# Altium PCB PCB_BanTay_v1-copy_2025-10-17.pcbdoc (part 1 of 2)
Units mm, origin at the board's own origin, x right, y up, seen from the top; angles counter-clockwise.
Board outline 141.09 x 106.47 mm, 2 copper layers (Top Layer, Bottom Layer); 135 components, 142 nets, 539 pads, 635 vias.
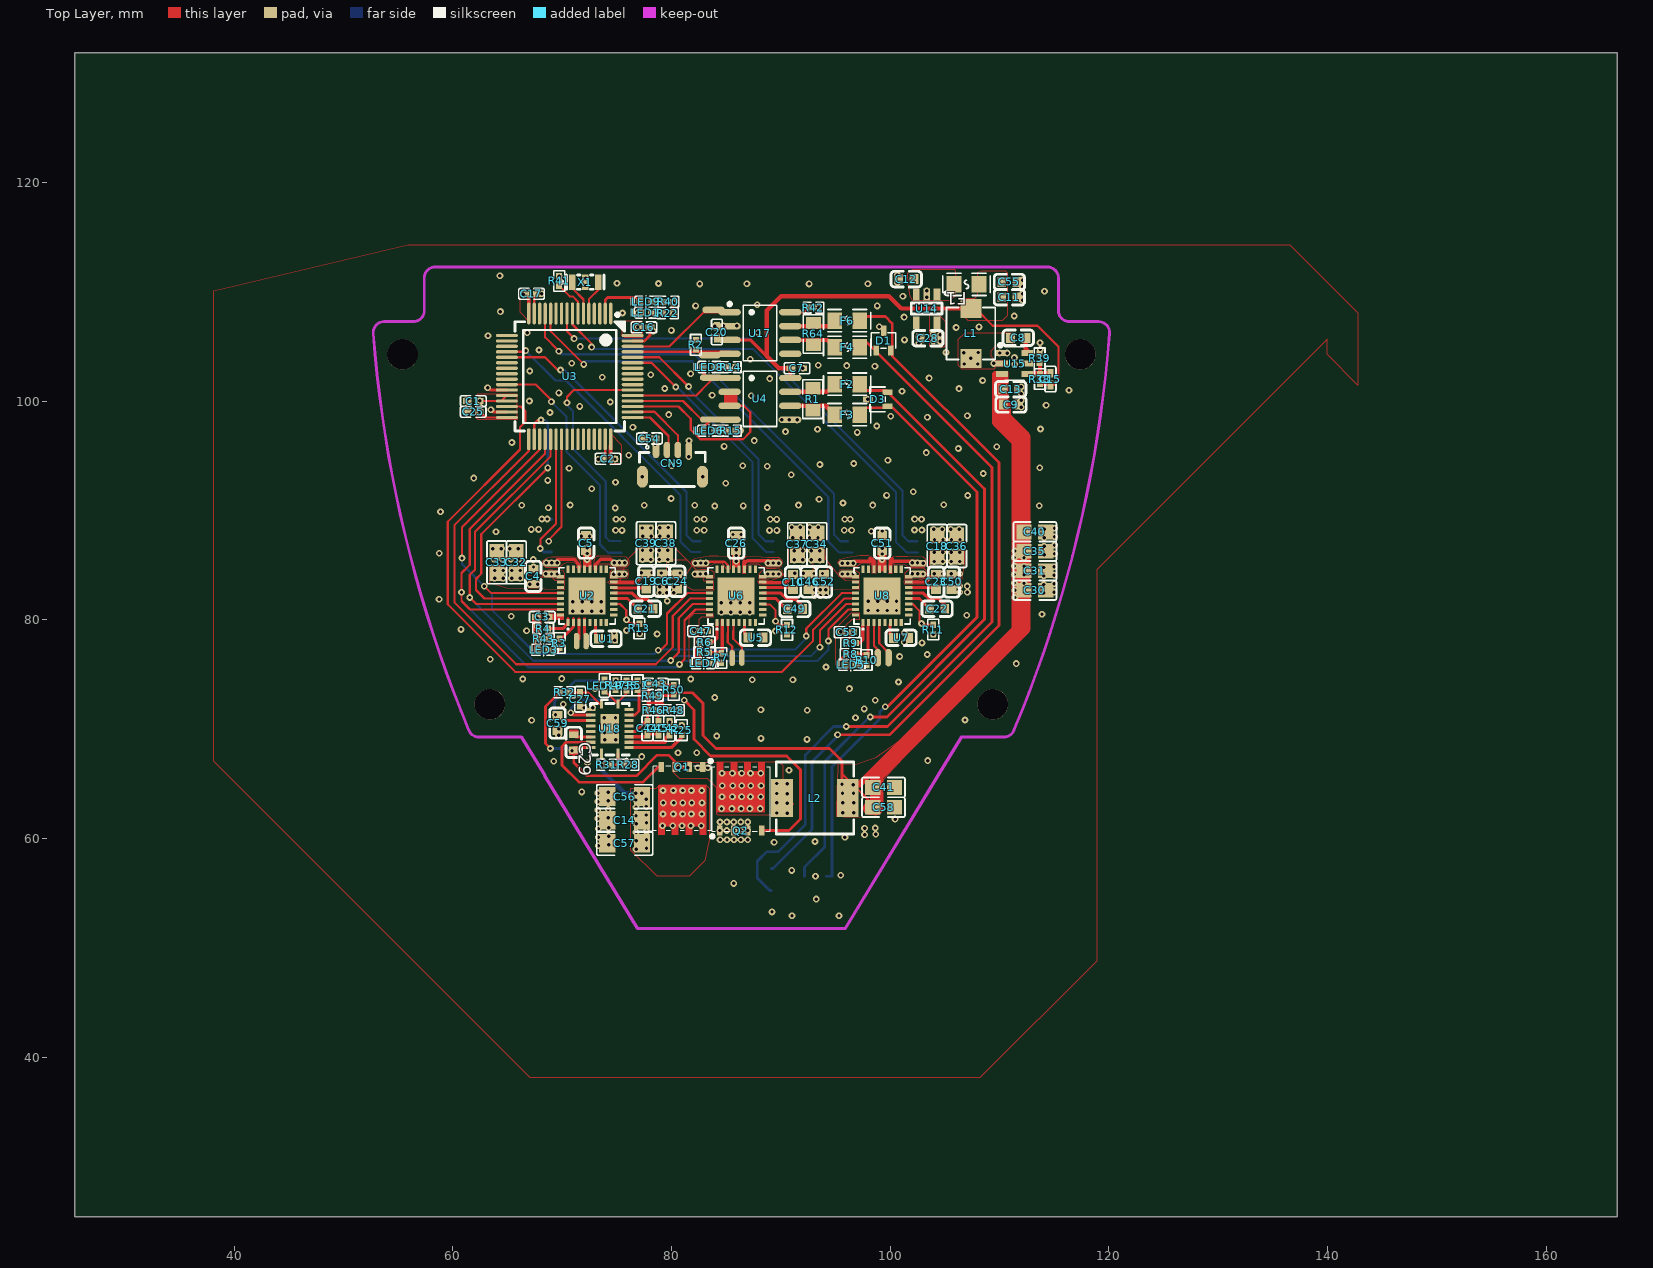
[diagram p0: Top Layer view]
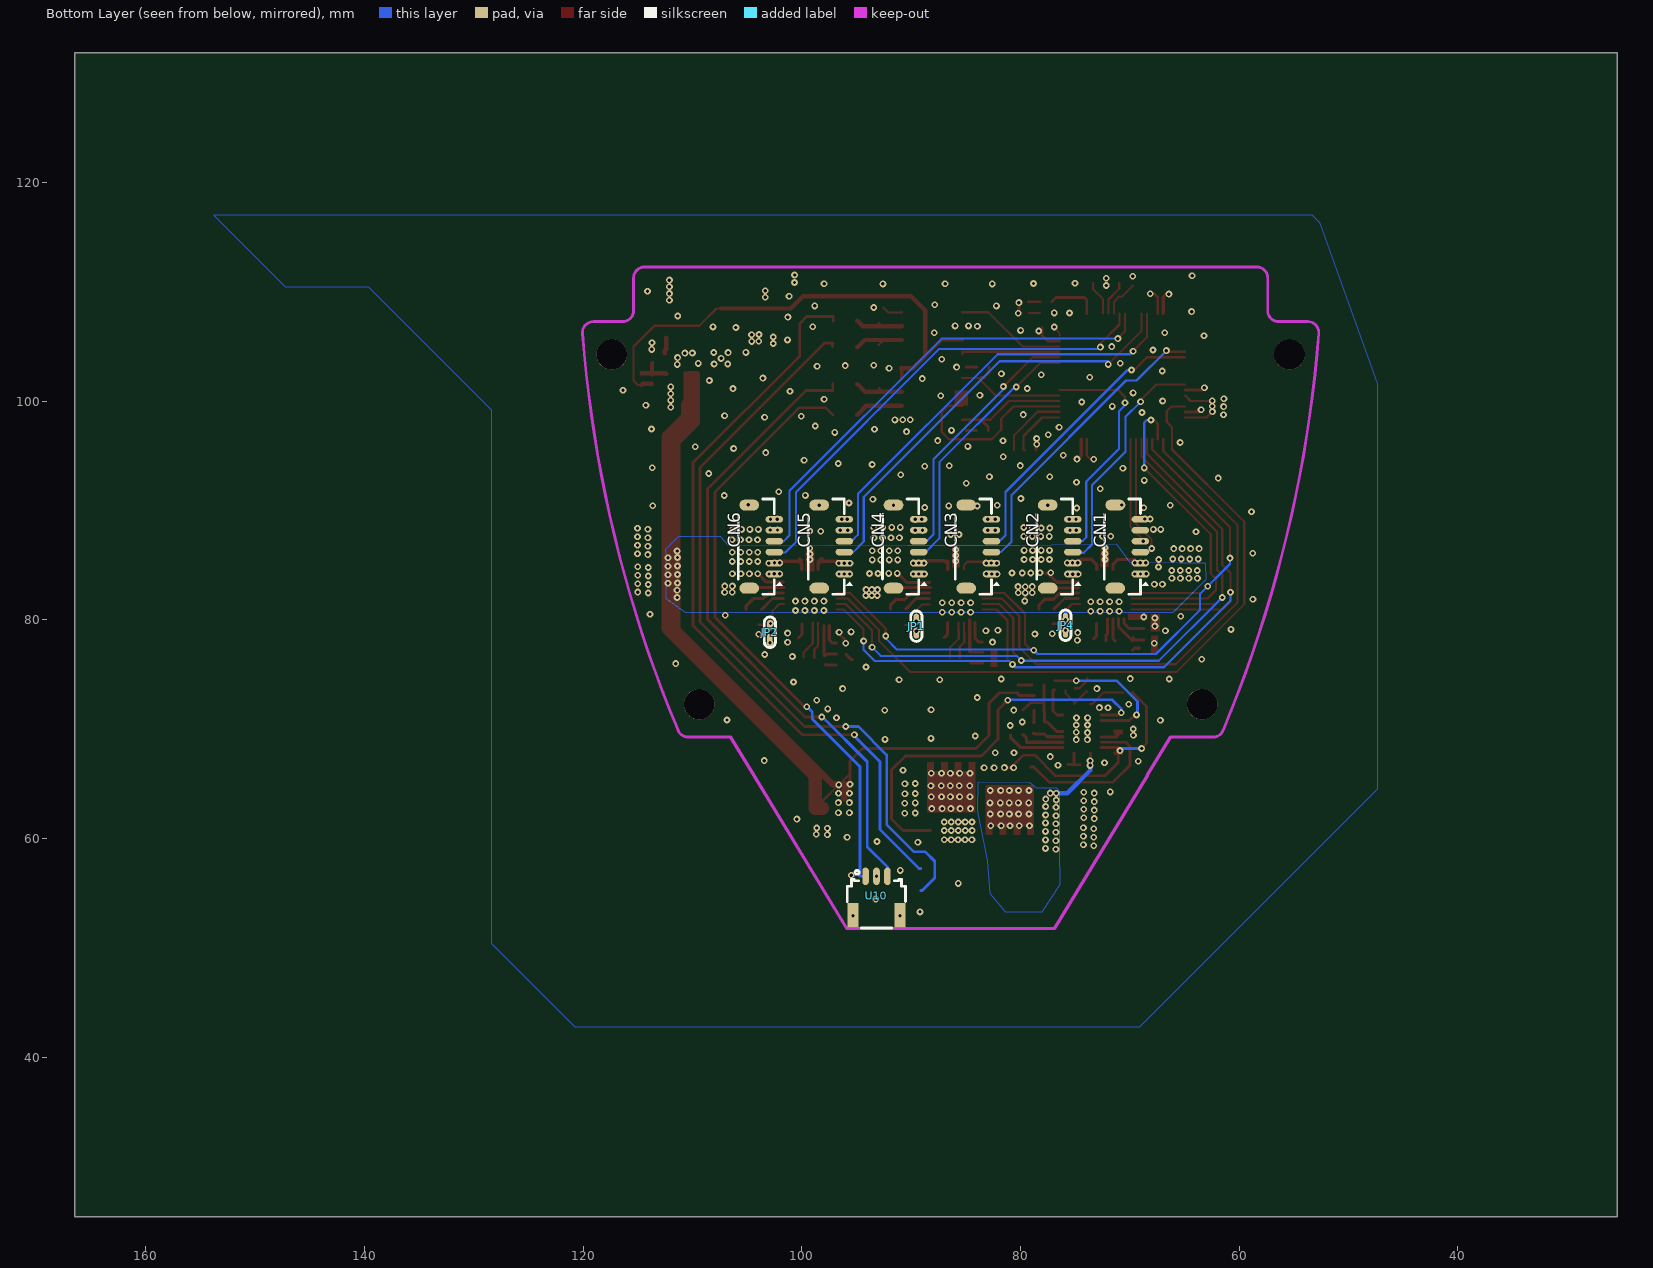
[diagram p1: Bottom Layer view, seen from below]

## Layer stack, top to bottom
Top Layer: signal copper (thickness not stored)
Dielectric: dielectric 0.32, FR-4, Dk 4.8
Bottom Layer: signal copper (thickness not stored)

## Board outline
166.495,25.4 25.4,25.4 25.4,131.87 166.495,131.87

## Components (designator, comment, footprint, x,y, rotation, side; value= is the part's Value field where it differs from the comment)
C1 "100nF" C0402 61.86,100 r0 top
C2 "100nF" C0402 74.17,94.72 r0 top
C3 "100nF" C0402 68.17,80.26 r0 top
C4 "220nF" C0603#1 67.35,83.97 r270 top
C5 "220nF" C0603#2 72.18,87.01 r90 top
C6 "220nF" C0603#2 79.11,83.52 r90 top
C7 "100nF" C0402 91.46,103.01 r0 top
C8 "100nF" C0603#2 111.7,105.79 r0 top
C9 "10uF" C0603#2 111.04,99.69 r180 top
C10 "1uF" C0603#2 91.1,83.45 r90 top
C11 "22uF" C0603#2 110.89,109.5 r180 top
C12 "1uF" C0603#2 101.46,111.16 r0 top
C13 "100nF" C0603#2 111.01,101.09 r180 top
C14 "4.7uF" C1206 75.7,61.67 r0 top
C15 "75pF" C0402 114.65,102.02 r270 top
C16 "100nF" C0402 77.47,106.74 r180 top
C17 "100nF" C0402 67.18,109.81 r180 top
C18 "10uF" C0805 104.293,86.75 r270 top
C19 "1uF" C0603#2 77.68,83.52 r90 top
C20 "100nF" C0402 84.14,106.32 r90 top
C21 "22nF" C0603#2 77.6,81.01 r180 top
C22 "22nF" C0603#2 104.28,81.01 r180 top
C23 "1uF" C0603#2 104.19,83.46 r90 top
C24 "220nF" C0603#2 80.51,83.52 r90 top
C25 "1uF" C0402 61.85,99.02 r0 top
C26 "220nF" C0603#2 85.9,87.01 r90 top
C27 "12pF" C0402 71.63,72.73 r270 top
C28 "1uF" C0603#2 103.44,105.75 r180 top
C29 "100nF" C0603#3 71.04,68.79 r270 top
C30 "10uF" C0805 113.23,82.711 r180 top
C31 "10uF" C0805 113.23,84.487 r180 top
C32 "10uF" C0805 65.79,85.25 r270 top
C33 "10uF" C0805 64.014,85.25 r270 top
C34 "10uF" C0805 93.286,86.92 r270 top
C35 "10uF" C0805 113.23,86.264 r180 top
C36 "10uF" C0805 106.07,86.75 r270 top
C37 "10uF" C0805 91.51,86.92 r270 top
C38 "10uF" C0805 79.46,87 r270 top
C39 "10uF" C0805 77.684,87 r270 top
C40 "10uF" C0805 113.23,88.04 r180 top
C41 "22uF" C0805 99.38,64.67 r0 top
C42 "1uF" C0402 79.79,70.07 r270 top
C43 "470pF" C0402 78.53,74.13 r0 top
C44 "330pF" C0402 77.79,70.1 r90 top
C45 "3.9nF" C0402 78.79,70.1 r270 top
C46 "220nF" C0603#2 92.52,83.46 r90 top
C47 "100nF" C0402 82.64,78.97 r180 top
C49 "22nF" C0603#2 91.27,80.99 r180 top
C50 "220nF" C0603#2 105.61,83.46 r90 top
C51 "220nF" C0603#2 99.26,87.01 r90 top
C52 "220nF" C0603#2 93.94,83.46 r90 top
C53 "100nF" C0402 96.03,78.87 r180 top
C54 "100nF" C0402 77.97,96.58 r0 top
C55 "22uF" C0603#2 110.89,110.9 r180 top
C56 "4.7uF" C1206 75.7,63.83 r0 top
C57 "4.7uF" C1206 75.7,59.56 r0 top
C58 "22uF" C0805 99.38,62.86 r0 top
C59 "2.2uF" C0603#2 69.56,70.55 r90 top
CN1 "XY-SH1.0-6A51" CONN-SMD_6P-P1.00_XY-SH1.0-6A51 70.173,86.69 r270 bottom
CN2 "XY-SH1.0-6A51" CONN-SMD_6P-P1.00_XY-SH1.0-6A51 76.35,86.69 r270 bottom
CN3 "XY-SH1.0-6A51" CONN-SMD_6P-P1.00_XY-SH1.0-6A51 83.797,86.69 r270 bottom
CN4 "XY-SH1.0-6A51" CONN-SMD_6P-P1.00_XY-SH1.0-6A51 90.45,86.69 r270 bottom
CN5 "XY-SH1.0-6A51" CONN-SMD_6P-P1.00_XY-SH1.0-6A51 97.25,86.69 r270 bottom
CN6 "XY-SH1.0-6A51" CONN-SMD_6P-P1.00_XY-SH1.0-6A51 103.65,86.69 r270 bottom
CN9 "1.0-4P LT" CONN-SMD_4P-P1.00_SHOU-HAN_1.0-4P-LT 80.07,94.31 r0 top
D1 "TPD2E007DCKR" SOT-323-3_L2.0-W1.3-P1.30-LS2.1-BR 99.38,105.54 r270 top
D3 "TPD2E007DCKR" SOT-323-3_L2.0-W1.3-P1.30-LS2.1-BR 98.85,100.17 r0 top
F1 "JK-SMD0805-050" F0805 106.97,110.68 r180 top
F2 "JK-SMD0805-050" F0805 96.05,101.56 r0 top
F3 "JK-SMD0805-050" F0805 96.05,98.76 r0 top
F4 "JK-SMD0805-050" F0805 96.05,104.93 r0 top
F6 "JK-SMD0805-050" F0805 96.05,107.36 r0 top
JP1 "SB" "SOLDER BRIDGE FOOTPRINT" 89.51,79.42 r90 bottom
JP2 "SB" "SOLDER BRIDGE FOOTPRINT" 102.91,78.86 r90 bottom
JP4 "SB" "SOLDER BRIDGE FOOTPRINT" 75.87,79.5 r90 bottom
L1 "10uH" IND-SMD_L4.5-W4.5_SMMS0420 107.37,106.19 r270 top
L2 "4.7uH" IND-SMD_L7.1-W6.6_SL0650 93.11,63.7 r0 top
LED1 "TZ-P2-0402RTIA1-0.45T" LED0402-RD_RED 77.64,108.1 r0 top
LED3 "TZ-P2-0402RTIA1-0.45T" LED0402-RD_RED 68.29,77.26 r180 top
LED5 "TZ-P2-0402RTIA1-0.45T" LED0402-RD_RED 96.37,75.87 r180 top
LED6 "TZ-P2-0402YGTIA1-0.45T" LED0402-RD_GREEN 83.42,97.31 r0 top
LED7 "TZ-P2-0402RTIA1-0.45T" LED0402-RD_RED 82.94,76.04 r180 top
LED8 "TZ-P2-0402 0TIA1-0.45T" LED0402-RD_ORANGE 83.42,103.12 r0 top
LED9 "SZYY0402B" LED0402-RD_BLUE 77.66,109.1 r0 top
LED10 "TZ-P2-0402RTIA1-0.45T" LED0402-RD_RED 73.87,73.98 r90 top
Q1 "BSC070N10NS5(ES)" TDSON-8_L5.9-W5.2-P1.27-BL-1 80.96,64.77 r180 top
Q2 "BSC070N10NS5(ES)" TDSON-8_L5.9-W5.2-P1.27-BL-1 86.32,62.5 r0 top
R1 "120Ω" R0805 92.92,100.18 r90 top
R2 "10kΩ" R0402 82.22,105.15 r270 top
R3 "1kΩ" R0402 69.74,77.87 r90 top
R4 "12kΩ" R0402 68.25,79.19 r0 top
R5 "10kΩ" R0402 82.99,77.01 r180 top
R6 "12kΩ" R0402 83.02,77.96 r0 top
R7 "1kΩ" R0402 84.54,76.51 r90 top
R8 "10kΩ" R0402 96.38,76.86 r180 top
R9 "12kΩ" R0402 96.4,77.86 r0 top
R10 "1kΩ" R0402 97.83,76.32 r90 top
R11 "10kΩ" R0402 103.93,79.11 r270 top
R12 "10kΩ" R0402 90.55,79.08 r270 top
R13 "10kΩ" R0402 77.05,79.21 r270 top
R14 "1kΩ" R0402 85.4,103.11 r0 top
R15 "1kΩ" R0402 85.4,97.31 r0 top
R22 "1kΩ" R0402 79.65,108.06 r180 top
R25 "33kΩ" R0402 80.92,69.9 r270 top
R28 "12.4kΩ" R0402 76.05,66.75 r180 top
R31 "49.9kΩ" R0402 74.08,66.75 r180 top
R32 "392Ω" R0402 70.21,73.36 r180 top
R35 "20kΩ" R0402 75.88,73.99 r90 top
R38 "100kΩ" R0402 113.69,102.02 r270 top
R39 "13.7kΩ" R0402 113.65,103.91 r270 top
R40 "1kΩ" R0402 79.68,109.08 r0 top
R41 "10kΩ" R0402 69.71,110.99 r90 top
R42 "4.7kΩ" R0402 92.97,108.56 r180 top
R43 "10kΩ" R0402 68.28,78.25 r180 top
R46 "3.57kΩ" R0402 78.3,71.74 r0 top
R47 "2.2kΩ" R0402 74.88,74 r270 top
R48 "3.09kΩ" R0402 80.18,71.74 r180 top
R49 "24kΩ" R0402 78.27,73.07 r0 top
R50 "47.5Ω" R0402 80.19,73.59 r270 top
R51 "1kΩ" R0402 76.88,74 r270 top
R64 "120Ω" R0805 92.96,106.15 r90 top
U1 "2.2uF" C0603#2 74,78.26 r0 top
U2 "MAX22216ATJY+_C20416745" QFN-32_L5.0-W5.0-P0.50-TL-EP3.4 72.27,82.19 r90 top
U3 "STM32G474RET6" LQFP-64_L10.0-W10.0-P0.50-LS12.0-BL 70.68,102.26 r180 top
U4 "MAX485CSA+T" SOIC-8_L4.9-W3.9-P1.27-LS6.0-BL 88.08,100.21 r270 top
U5 "2.2uF" C0603#2 87.67,78.37 r0 top
U6 "MAX22216ATJY+_C20416745" QFN-32_L5.0-W5.0-P0.50-TL-EP3.4 85.9,82.19 r90 top
U7 "2.2uF" C0603#2 100.99,78.35 r0 top
U8 "MAX22216ATJY+_C20416745" QFN-32_L5.0-W5.0-P0.50-TL-EP3.4 99.25,82.189 r90 top
U10 "HX 1.0-3P WTDK" CONN-SMD_3P-P1.00_HANXIA_HX-1.0-3P-WTDK 93.16,54.74 r0 bottom
U14 "AP2112K-3.3TRG1" SOT-25-5_L2.9-W1.6-P0.95-LS2.8-BL 103.33,108.47 r180 top
U15 "TPS54302DDCR" SOT-23-6_L2.9-W1.6-P0.95-LS2.8-BL 111.37,103.44 r270 top
U17 "TJA1051T/1J" SOIC-8_L4.9-W3.9-P1.27-LS6.0-BL 88.08,106.23 r270 top
U18 "LM5146RGYR" VQFN-20_L4.5-W3.5-P0.50-BL-EP 74.35,70.05 r90 top
X1 "8MHz" OSC-SMD_3P-L3.2-W1.3-P1.20-L 72.1,110.88 r0 top

## Footprints (in the part's own frame and the unit in brackets; to place one, negate y for a bottom-side part, rotate by r counter-clockwise, add the part's x,y. Pads: shape width x height; smd on the part's side, far side on the other; paste and mask are expansions set on the pad)
C0402 [mm]
  rect 0.79x0.54 smd paste-100 mask+0.051: 1(-0.545,0) 2(0.545,0)
  silkscreen extent -1.17,-0.5 1.17,0.5
C0603#1 [mm]
  rect 0.7x0.9 smd paste+0 mask+0.051: 1(-0.7,0) 2(0.7,0)
  silkscreen extent -1.39,-0.71 1.39,0.71
C0603#2 [mm]
  rect 0.8x0.9 smd paste+0 mask+0.051: 1(-0.7,0) 2(0.7,0)
  silkscreen extent -1.39,-0.71 1.39,0.71
C0603#3 [mm]
  rect 0.6x0.9 smd paste+0 mask+0.051: 1(-0.7,0) 2(0.7,0)
  silkscreen extent -1.39,-0.71 1.39,0.71
C0805 [mm]
  rect 1.41x1.35 smd paste-100 mask+0.051: 1(-1,0) 2(1,0)
  silkscreen extent -1.96,-0.9 1.96,0.9
C1206 [mm]
  rect 1.485x1.728 smd paste-100 mask+0.051: 1(-1.593,0) 2(1.593,0)
  silkscreen extent -2.56,-1.09 2.56,1.09
CONN-SMD_3P-P1.00_HANXIA_HX-1.0-3P-WTDK [mm]
  oval 0.6x1.6 smd paste+0 mask+0.051: 1(1,-1.8) 2(0,-1.8) 3(-1,-1.8)
  rect 1x2.3 smd paste+0 mask+0.051: 4(-2.15,1.8) 5(2.15,1.8)
  silkscreen extent -2.67,-2.34 2.67,2.92
CONN-SMD_4P-P1.00_SHOU-HAN_1.0-4P-LT [mm]
  oval 0.6x1.5 smd paste+0 mask+0.05: 1(-1.5,1.225) 2(-0.5,1.225) 3(0.5,1.225) 4(1.5,1.225)
  oval 1x2 smd paste+0 mask+0.05: 5(2.75,-1.225) 6(-2.75,-1.225)
  silkscreen extent -3,-2.12 3,1.62
CONN-SMD_6P-P1.00_XY-SH1.0-6A51 [mm]
  oval 0.6x1.6 smd paste+0 mask+0.05: 1(2.5,1.15) 2(1.5,1.15) 3(0.5,1.15) 4(-0.5,1.15) 5(-1.5,1.15) 6(-2.5,1.15)
  oval 1x1.8 smd paste+0 mask+0.05: 7(-3.8,-1.15) 8(3.8,-1.15)
  silkscreen extent -4.35,-2.15 4.35,1.91
F0805 [mm]
  rect 1.335x1.5 smd paste-100 mask+0.051: 1(-1.142,0) 2(1.142,0)
  silkscreen extent -2.16,-1.02 2.16,1.02
IND-SMD_L4.5-W4.5_SMMS0420 [mm]
  rect 1.724x1.92 smd paste+0 mask+0.051: 1(2.278,0) 2(-2.278,0)
  silkscreen extent -2.38,-2.23 2.38,2.23
IND-SMD_L7.1-W6.6_SL0650 [mm]
  rect 2x3.5 smd paste+0 mask+0.051: 1(-3,0) 2(2.999,0)
  silkscreen extent -3.55,-3.3 3.55,3.3
LED0402-RD_BLUE [mm]
  rect 0.636x0.54 smd paste-100 mask+0.051: 1(-0.538,0) 2(0.538,0)
  silkscreen extent -1.39,-0.54 1.09,0.54
LED0402-RD_GREEN [mm]
  rect 0.636x0.54 smd paste-100 mask+0.051: 1(-0.538,0) 2(0.538,0)
  silkscreen extent -1.39,-0.54 1.09,0.54
LED0402-RD_ORANGE [mm]
  rect 0.636x0.54 smd paste-100 mask+0.051: 1(-0.538,0) 2(0.538,0)
  silkscreen extent -1.39,-0.54 1.09,0.54
LED0402-RD_RED [mm]
  rect 0.636x0.54 smd paste-100 mask+0.051: 1(-0.508,0) 2(0.508,0)
  silkscreen extent -1.39,-0.54 1.09,0.54
LQFP-64_L10.0-W10.0-P0.50-LS12.0-BL [mm]
  oval 0.3x2 smd paste+0 mask+0.051: 1(-3.75,-5.75) 2(-3.25,-5.75) 3(-2.75,-5.75) 4(-2.25,-5.75) 5(-1.75,-5.75) 6(-1.25,-5.75) 7(-0.75,-5.75) 8(-0.25,-5.75) 9(0.25,-5.75) 10(0.75,-5.75) 11(1.25,-5.75) 12(1.75,-5.75) 13(2.25,-5.75) 14(2.75,-5.75) 15(3.25,-5.75) 16(3.75,-5.75) 33(3.75,5.75) 34(3.25,5.75) 35(2.75,5.75) 36(2.25,5.75) 37(1.75,5.75) 38(1.25,5.75) 39(0.75,5.75) 40(0.25,5.75) 41(-0.25,5.75) 42(-0.75,5.75) 43(-1.25,5.75) 44(-1.75,5.75) 45(-2.25,5.75) 46(-2.75,5.75) 47(-3.25,5.75) 48(-3.75,5.75)
  oval 2x0.3 smd paste+0 mask+0.051: 17(5.75,-3.75) 18(5.75,-3.25) 19(5.75,-2.75) 20(5.75,-2.25) 21(5.75,-1.75) 22(5.75,-1.25) 23(5.75,-0.75) 24(5.75,-0.25) 25(5.75,0.25) 26(5.75,0.75) 27(5.75,1.25) 28(5.75,1.75) 29(5.75,2.25) 30(5.75,2.75) 31(5.75,3.25) 32(5.75,3.75) 49(-5.75,3.75) 50(-5.75,3.25) 51(-5.75,2.75) 52(-5.75,2.25) 53(-5.75,1.75) 54(-5.75,1.25) 55(-5.75,0.75) 56(-5.75,0.25) 57(-5.75,-0.25) 58(-5.75,-0.75) 59(-5.75,-1.25) 60(-5.75,-1.75) 61(-5.75,-2.25) 62(-5.75,-2.75) 63(-5.75,-3.25) 64(-5.75,-3.75)
  silkscreen extent -5,-5.79 5,5
OSC-SMD_3P-L3.2-W1.3-P1.20-L [mm]
  rect 0.6x1.4 smd paste+0 mask+0.051: 1(-1.199,0) 2(0,0) 3(1.199,0)
  silkscreen extent -2.28,-0.65 1.72,0.66
QFN-32_L5.0-W5.0-P0.50-TL-EP3.4 [mm]
  rect 0.665x0.28 smd paste-100 mask+0.051: 1(-2.432,1.75) 2(-2.432,1.25) 3(-2.432,0.75) 4(-2.432,0.25) 5(-2.432,-0.25) 6(-2.432,-0.75) 7(-2.432,-1.25) 8(-2.432,-1.75) 17(2.432,-1.75) 18(2.432,-1.25) 19(2.432,-0.75) 20(2.432,-0.25) 21(2.432,0.25) 22(2.432,0.75) 23(2.432,1.25) 24(2.432,1.75)
  rect 0.28x0.665 smd paste-100 mask+0.051: 9(-1.75,-2.432) 10(-1.25,-2.432) 11(-0.75,-2.432) 12(-0.25,-2.432) 13(0.25,-2.432) 14(0.75,-2.432) 15(1.25,-2.432) 16(1.75,-2.432) 25(1.75,2.432) 26(1.25,2.432) 27(0.75,2.432) 28(0.25,2.432) 29(-0.25,2.432) 30(-0.75,2.432) 31(-1.25,2.432) 32(-1.75,2.432)
  rect 3.4x3.4 smd paste-100 mask+0.051: 33(0,0)
  silkscreen extent -3.11,-2.58 2.58,2.58
R0402 [mm]
  rect 0.566x0.54 smd paste-100 mask+0.051: 1(-0.433,0) 2(0.433,0)
  silkscreen extent -0.94,-0.5 0.94,0.5
R0805 [mm]
  rect 1.133x1.377 smd paste-100 mask+0.051: 1(-1,0) 2(1,0)
  silkscreen extent -1.76,-0.92 1.76,0.92
SOIC-8_L4.9-W3.9-P1.27-LS6.0-BL [mm]
  oval 0.588x2.045 smd paste+0 mask+0.051: 1(-1.905,-2.773) 2(-0.635,-2.773) 3(0.635,-2.773) 4(1.905,-2.773) 5(1.905,2.773) 6(0.635,2.773) 7(-0.635,2.773) 8(-1.905,2.773)
  silkscreen extent -2.8,-2.92 2.53,1.52
"SOLDER BRIDGE FOOTPRINT" [mm]
  oval 1x0.5 smd paste+0 mask+0.051: 1(0.635,0) 2(-0.635,0)
  silkscreen extent -1.4,-0.51 1.4,0.51
SOT-23-6_L2.9-W1.6-P0.95-LS2.8-BL [mm]
  rect 0.532x1.072 smd paste+0 mask+0.051: 1(-0.95,-1.149) 2(0,-1.149) 3(0.95,-1.149) 4(0.95,1.149) 5(0,1.149) 6(-0.95,1.149)
  silkscreen extent -1.82,-1.45 1.54,0.89
SOT-25-5_L2.9-W1.6-P0.95-LS2.8-BL [mil]
  rect 24.5x43.5 smd paste+0 mask+2: 1(-37.39,-51.18) 2(-0.03,-51.18) 3(37.39,-51.18) 4(37.39,51.18) 5(-37.39,51.18)
  silkscreen extent -75,-60 56,20
SOT-323-3_L2.0-W1.3-P1.30-LS2.1-BR [mm]
  rect 0.936x0.5 smd paste+0 mask+0.051: 1(0.898,-0.65) 2(0.898,0.65) 3(-0.898,0)
  silkscreen extent -0.7,-1.13 0.7,1.13
TDSON-8_L5.9-W5.2-P1.27-BL-1 [mm]
  rect 0.5x0.9 smd paste-100 mask+0.05: 1(-1.905,-1.775) 2(-0.635,-1.775) 3(0.635,-1.775) 4(1.905,-1.775)
  Top Layer region: -2.205,-0.1 2.205,-0.1 2.205,4.45 1.605,4.45 1.605,3.65 0.935,3.65 0.935,4.45 0.335,4.45 0.335,3.65 -0.335,3.65 -0.335,4.45 -0.935,4.45 -0.935,3.65 -1.605,3.65 -1.605,4.45 -2.205,4.45
  silkscreen extent -2.75,-2.46 2.66,4.06
VQFN-20_L4.5-W3.5-P0.50-BL-EP [mm]
  rect 0.85x0.28 smd paste+0 mask+0.051: 1(-2.25,-0.752) 10(2.25,-0.752) 11(2.25,0.748) 20(-2.25,0.75)
  rect 0.28x0.85 smd paste+0 mask+0.051: 2(-1.749,-1.75) 3(-1.248,-1.75) 4(-0.749,-1.75) 5(-0.248,-1.75) 6(0.251,-1.75) 7(0.752,-1.75) 8(1.251,-1.75) 9(1.752,-1.75) 12(1.752,1.75) 13(1.251,1.75) 14(0.75,1.748) 15(0.25,1.748) 16(-0.25,1.748) 17(-0.75,1.748) 18(-1.25,1.748) 19(-1.75,1.748)
  rect 2.7x1.7 smd paste+0 mask+0.051: 21(0,-0.002)
  silkscreen extent -3.05,-1.78 2.29,1.78

## Free pads (board coordinates)
  oval 1.6x0.6 smd paste+0 mask+0.05: 1(69.02,84.19) 1(75.2,85.19) 1(82.64,84.19) 1(89.3,84.19) 1(96.1,84.19) 1(102.5,84.19) 2(69.02,85.19) 2(75.2,84.19) 2(82.65,85.19) 2(89.299,85.19) 2(96.098,85.19) 2(102.5,85.19)
  oval 2.045x0.588 smd paste+0 mask+0.051: 1(83.6,102.15) 1(83.62,98.32) 1(83.83,108.35) 4(83.48,104.21)
  oval 0.5x1.5 smd paste+0 mask+0.05: 3(72.17,78.05) 4(71.31,78.05) 6(86.42,76.53) 7(85.54,76.51)
  oval 0.6x1.6 smd paste+0 mask+0.05: 8(98.86,76.53) 9(99.84,76.54)
  round 2.8 hole 2.8 unplated paste+0: ""(55.378,104.273) ""(63.378,72.273) ""(109.378,72.273) ""(117.378,104.273)

## Via types
v1: diameter 0.62, hole 0.31, Top Layer to Bottom Layer, tented both sides, 635 vias

## Nets (pads, with @x,y where several pads share a name; then routed paths per layer and width w, separated by ;. In a path a pad name is that pad's centre, name@x,y a point inside that pad or via, vN(x,y) a via of type N, cw(c..) or ccw(c..) an arc to the next point about the centre after c; other vN are vias at no path point)
+3.3V: C1.2 C2.2 C3.2 C16.2 C17.2 C25.2 C28.1 C47.2 C53.2 C54.2 CN1.6 CN2.6 CN3.6 CN4.6 CN5.6 CN6.6 CN9.1 JP1.2 JP2.2 JP4.2 LED3.2 LED5.2 LED7.2 R5.2 R8.2 R14.2 R15.2 R22.1 R40.2 R41.2 R43.2 U2.32 U3.16 U3.28 U3.29 U3.32 U3.48 U3.64 U6.32 U8.32 U14.5 | length 17
  Top Layer w0.2: C1.2@62.405,100 62.405,99.071 v1(62.435,99.041) 62.966,98.51 U3.32@64.93,98.51 ; v1@62.55,99.51 62.445,99.615 v1(62.445,100.019) 64.439,100.019 U3.28@64.93,100.51 ; U3.64@76.43,106.01 76.43,106.245 C16.2@76.925,106.74
  Top Layer w0.254: v1(78.515,96.58) 78.57,96.525 CN9.1@78.57,95.535 ; R22.1@80.083,108.06 80.113,108.09 R40.2@80.113,109.08
  Top Layer w0.28: 95.372,76.35 95.437,76.35 R8.2@95.947,76.86
  Top Layer w0.3: v1(66.41,109.79) 66.615,109.79 C17.2@66.635,109.81 66.93,109.515 U3.16@66.93,108.01 ; C3.2@68.715,80.26 68.715,80.441 U2.32@69.838,80.441 ; U3.48@74.43,96.51 74.43,95.005 C2.2@74.715,94.72
  Bottom Layer w0.28: v1(68.13,89.22) 68.992,89.22 CN1.6@69.023,89.19
  other v1: 67.75,77.86 102.9,77.89 95.48,78.89 89.51,78.97 75.87,79.03 82.05,79.04 68.715,80.26 74.91,89.19 75.52,89.19 82.29,89.19 89.02,89.19 89.62,89.18 95.84,89.19 96.33,89.19 102.85,89.19 82.97,89.2 102.22,89.21 68.62,89.22 74.815,94.7 78.5,96.05 86.3,97.32 62.44,99.53 85.833,103.11 103.93,105.47 104.57,105.46 104.58,106.07 103.91,106.09 76.89,106.78 80.19,108.03 80.13,109.01 69.71,111.423
+5V: C7.1 C11.2 C15.2 C20.1 C55.2 F1.1 L1.2 R38.2 U4.8 U17.3 | length 48.6
  Top Layer w0.2: L1.2@107.37,108.468 107.793,108.467 109.368,106.89 113.47,106.89 115.39,104.97 115.39,101.871 114.994,101.474 C15.2@114.65,101.475
  Top Layer w0.3: U17.3@85.307,105.595 87.196,105.594 89.782,103.009 C7.1@90.915,103.01 ; U4.8@90.852,102.115 90.852,102.947 C7.1@90.915,103.01
  Top Layer w0.4: C7.1@90.915,103.01 89.81,103.009 88.7,104.119 88.7,108.289 90.01,109.6 99.871,109.6 101.001,108.467 L1.2@107.37,108.468 ; R38.2@113.69,101.587 114.537,101.587 C15.2@114.65,101.475
A: D3.1 F3.2 U10.1 | length 55.5
  Top Layer w0.254: F3.2@97.143,98.739 97.793,99.389 100.231,99.389 107.93,91.69 107.93,80.23 99.749,72.051 v1@99.53,72.051
  Bottom Layer w0.254: U10.1@94.16,56.54 94.661,56.539 94.661,66.56 99.03,70.928 99.03,71.551 v1@99.53,72.051
  other v1: 99.53,72.05
B: D3.2 F2.2 U10.3 | length 59
  Top Layer w0.254: F2.2@97.152,101.6 97.152,100.98 99.62,100.98 108.62,91.98 108.62,80.05 99.68,71.11 v1(98.16,71.11)
  Bottom Layer w0.254: U10.3@92.16,56.54 92.16,57.38 94,59.22 94,67.02 98.09,71.11 v1(98.16,71.11)
C27_1: C27.1 R32.1 U18.11 | length 3.4
  Top Layer w0.2: R32.1@70.643,73.36 72.37,73.359 73.429,72.3 U18.11@73.602,72.3
C44_1: C44.1 C45.2 U18.4 | length 2.8
  Top Layer w0.28: U18.4@76.1,69.301 77.536,69.301 C44.1@77.79,69.555 78.74,69.555 C45.2@78.81,69.625
CANH: D1.2 F6.2 | length 69.1
  Top Layer w0.254: v1@95.179,69.481 99.919,69.481 109.929,79.491 109.929,94.37 100.17,104.129 100.17,107.118 99.548,107.741 97.122,107.741 F6.2@97.122,107.329
  Bottom Layer w0.254: 89.116,57.245 89.284,57.245 92.85,60.809 92.85,67.019 95.179,69.351 v1@95.179,69.481
  other v1: 95.18,69.48
CANL: D1.1 F4.2 | length 68.8
  Top Layer w0.254: v1(95.97,70.24) 99.731,70.24 109.289,79.801 109.289,93.931 97.91,105.31 97.183,105.31 F4.2@97.183,105
  Bottom Layer w0.254: 89.116,55.244 88.974,55.244 87.831,56.389 87.831,57.911 88.71,58.79 89.759,58.79 92.23,61.261 92.23,67.649 94.819,70.24 v1(95.97,70.24)
CSB1: U2.29 U3.34 | length 29
  Top Layer w0.2: U3.34@67.43,96.51 67.43,97.95 67.75,98.27 v1(68.05,98.27) 68.08,98.27 v1@68.1,98.29 ; v1(68.66,93.89) 62.591,87.822 62.591,84.22 62.101,83.73 62.101,82.729 62.891,81.939 U2.29@69.837,81.94
  Bottom Layer w0.2: v1(68.05,98.27) 68.43,98.27 68.66,98.04 v1(68.66,93.89)
DE: U3.51 U4.2 U4.3 | length 16.8
  Top Layer w0.2: U3.51@76.429,99.511 80.62,99.511 81.74,98.391 81.74,97.39 82.609,96.519 86.541,96.519 87.191,97.169 87.191,98.99 86.604,99.575 U4.3@85.307,99.575
DI: LED6.1 pad.1@83.62,98.32 U3.52 U4.4 | length 10.9
  Top Layer w0.2: U3.52@76.429,100.011 81.039,100.011 82.746,98.305 U4.4@85.307,98.305
  Top Layer w0.254: LED6.1@82.932,97.31 82.932,97.631 pad.1@83.62,98.32
DRV1_CRC_EN: JP4.1 R13.1 U2.11 | length 3.7
  Top Layer w0.2: U2.11@74.562,81.449 75.271,81.449 75.85,80.87 75.85,80.03 v1(75.87,80.01) 76.237,79.643 R13.1@77.05,79.643
DRV1_OUT0: CN1.1 pad.1@69.02,84.19 U2.25
  other v1: 68.482,84.2 69.01,84.19 69.532,84.19
DRV1_OUT1: CN1.2 pad.2@69.02,85.19 U2.22 | length 2.9
  Top Layer w0.3: pad.2@69.54,85.201 69.54,85.521 71.09,85.521 71.519,85.089 U2.22@71.52,84.622
  other v1: 68.522,85.2 69.02,85.2 69.54,85.2
DRV1_OUT2: CN2.2 pad.1@75.2,85.19 U2.19 | length 2.5
  Top Layer w0.3: U2.19@73.02,84.622 73.02,85.041 73.513,85.531 74.42,85.531 pad.1@74.74,85.211
  other v1: 74.74,85.21 75.229,85.21 75.72,85.22
DRV1_OUT3: CN2.1 pad.2@75.2,84.19 U2.16
  other v1: 74.72,84.18 75.199,84.17 75.69,84.18
DRV2_CRC_EN: JP1.1 R12.1 U6.11 | length 3.6
  Top Layer w0.2: U6.11@88.303,81.411 88.979,81.411 89.51,80.88 v1(89.51,79.87) 89.868,79.511 R12.1@90.549,79.511
DRV2_OUT0: CN3.1 pad.1@82.64,84.19 U6.25
  other v1: 82.13,84.18 82.628,84.19 83.12,84.2
DRV2_OUT1: CN3.2 pad.2@82.65,85.19 U6.22 | length 2.6
  Top Layer w0.2: pad.2@83.132,85.191 83.132,85.31 84.839,85.31 85.149,85 U6.22@85.149,84.622
  other v1: 82.152,85.18 82.65,85.19 83.132,85.19
DRV2_OUT2: CN4.2 pad.2@89.299,85.19 U6.19 | length 4.7
  Top Layer w0.28: 86.64,85.361 U6.19@86.65,84.622
  Top Layer w0.3: U6.19@86.65,84.622 86.65,85.109 86.929,85.389 89.789,85.389 pad.2@89.789,85.191
  other v1: 88.81,85.19 89.31,85.19 89.79,85.19
DRV2_OUT3: CN4.1 pad.1@89.3,84.19 U6.16
  other v1: 88.78,84.19 89.3,84.19 89.79,84.19
DRV3_CRC_EN: JP2.1 R11.1 U8.11 | length 3.7
  Top Layer w0.2: U8.11@101.611,81.44 102.06,81.44 102.66,80.84 102.66,79.763 102.766,79.657 v1(102.852,79.657) 102.966,79.543 R11.1@103.93,79.543
DRV3_OUT0: CN5.1 pad.1@96.1,84.19 U8.25
  other v1: 95.608,84.19 96.1,84.19 96.588,84.19
DRV3_OUT1: CN5.2 pad.2@96.098,85.19 U8.22 | length 3.9
  Top Layer w0.28: 98.11,85.61 98.25,85.61 98.519,85.34 U8.22@98.5,84.622
  Top Layer w0.3: pad.2@96.607,85.18 96.607,85.351 98.25,85.351 98.499,85.099 U8.22@98.5,84.622
  other v1: 95.588,85.18 96.12,85.18 96.608,85.18
DRV3_OUT2: CN6.2 pad.2@102.5,85.19 U8.19 | length 4.2
  Top Layer w0.28: U8.19@100,84.622 100,85.41 100.19,85.6
  Top Layer w0.3: U8.19@100,84.622 100,85.071 100.29,85.361 102.329,85.361 pad.2@102.489,85.201
  other v1: 102.01,85.2 102.49,85.2 103,85.18
DRV3_OUT3: CN6.1 pad.1@102.5,84.19 U8.16
  other v1: 102.02,84.2 102.5,84.2 102.99,84.19
FDCAN_RX: pad.4@83.48,104.21 R2.2 U3.61 U17.4 | length 9.1
  Top Layer w0.2: U3.61@76.43,104.51 85.309,104.51 U17.4@85.307,104.325
FDCAN_TX: pad.1@83.83,108.35 U3.62 U17.1 | length 10.2
  Top Layer w0.2: U3.62@76.429,105.01 79.81,105.01 82.934,108.134 U17.1@85.307,108.135
GND: C1.1 C2.1 C3.1 C4.1 C5.2 C6.1 C7.2 C9.1 C11.1 C12.1 C13.1 C14.1 C16.1 C17.1 C18.1 C20.2 C24.1 C25.1 C26.2 C27.2 C28.2 C30.1 C31.1 C32.1 C33.1 C34.1 C35.1 C36.1 C37.1 C38.1 C39.1 C40.1 C41.2 C42.1 C46.1 C47.1 C50.1 C51.2 C52.1 C53.1 C54.1 C55.1 C56.1 C57.1 C58.2 C59.1 CN1.5 CN1.7 CN2.5 CN2.7 CN3.5 CN3.7 CN4.5 CN4.7 CN5.5 CN5.7 CN6.5 CN6.7 CN9.4 CN9.5 CN9.6 D1.3 D3.3 LED1.1 Q2.1 Q2.2 Q2.3 R2.1 R4.1 R6.1 R9.1 R11.2 R12.2 R13.2 R25.1 R28.1 R39.1 R42.1 R48.1 U1.2 U2.5 U2.7 U2.8 U2.9 U2.10 U2.17 U2.18 U2.23 U2.24 U2.33 U3.15 U3.27 U3.31 U3.47 U3.63 U4.5 U5.2 U6.5 U6.7 U6.8 U6.9 U6.10 U6.17 U6.18 U6.23 U6.24 U6.33 U7.2 U8.5 U8.7 U8.8 U8.9 U8.10 U8.17 U8.18 U8.23 U8.24 U8.33 U10.2 U10.4 U10.5 U14.2 U15.1 U17.2 U18.6 U18.12 U18.15 U18.21 X1.2 | length 11.4
  Top Layer w0.2: C2.1@73.625,94.72 73.93,95.025 U3.47@73.93,96.51
  Top Layer w0.254: v1(63.17,101.23) 63.39,101.01 U3.27@64.93,101.01 ; v1(63.47,99.21) 63.669,99.01 U3.31@64.93,99.01 ; U3.15@67.43,108.01 67.43,109.515 C17.1@67.725,109.81 67.735,109.82 v1(68.12,109.82) ; U3.63@76.43,105.51 77.5,105.51 78.015,106.025 C16.1@78.015,106.74 ; v1(95.967,77.86) 95.966,78.107 96.576,78.716 C53.1@96.576,78.871
  other v1: 91.01,52.94 95.31,52.94 89.18,53.28 93.23,54.45 85.69,55.89 93.16,56.54 95.46,56.64 90.98,57.08 73.28,59.336 74.23,59.417 89.37,59.65 93.11,59.72 84.43,59.89 85.065,59.89 85.7,59.89 86.335,59.89 86.97,59.89 73.28,60.113 95.85,60.12 74.23,60.193 97.65,60.33 98.66,60.39 84.415,60.725 85.05,60.725 85.685,60.725 86.32,60.725 86.955,60.725 73.28,60.89 97.65,60.93 74.23,60.97 98.63,60.96 84.42,61.51 85.055,61.51 85.69,61.51 86.325,61.51 86.96,61.51 100.44,61.77 73.25,61.82 74.2,61.9 73.25,62.597 74.2,62.677 73.25,63.373 74.2,63.453 73.25,64.15 74.2,64.23 71.77,64.26 90.73,66.23 76.56,66.7 72.3,66.93 69.21,67.06 103.42,67.12 77.27,67.49 82.29,67.83 80.58,67.84 73.87,69.04 74.89,69.04 92.38,69.06 88.17,69.15 84.12,69.37 69.66,69.44 73.86,69.68 74.88,69.71 69.67,70.01 80.92,70.333 73.86,70.38 74.88,70.38 79.83,70.65 67.19,70.82 106.83,70.83 73.85,71.02 73.85,71.035 74.87,71.035 74.87,71.05 96.82,71.04 80.613,71.74 92.4,71.73 88.166,71.773 97.61,71.85 71.98,71.95 72.77,71.97 70.08,72.28 98.63,72.65 83.94,72.89 73,73.71 96.26,73.71 100.749,74.31 91.09,74.51 87.37,74.52 66.39,74.58 81.739,74.58 69.95,74.62 94.12,75.68 111.52,75.99 63.4,76.39 100.85,76.64 103.38,76.83 82.55,77.96 101.29,77.94 74.78,78.13 78.67,78.7 103.93,78.677 77.08,78.72 101.29,78.78 74.75,78.83 96.575,78.87 66.73,79 83.15,78.99 60.73,79.12 67.69,79.42 67.69,80.16 65.32,80.32 107,80.41 113.87,80.5 84.55,80.683 85.417,80.683 86.283,80.683 87.15,80.683 70.97,80.787 71.837,80.787 72.703,80.787 73.57,80.787 97.97,80.847 98.837,80.847 99.703,80.847 100.57,80.847 84.55,81.55 85.417,81.55 86.283,81.55 87.15,81.55 70.97,81.653 71.837,81.653 72.703,81.653 73.57,81.653 79.59,81.72 97.97,81.713 98.837,81.713 99.703,81.713 100.57,81.713 58.73,81.88 93.09,82.22 93.6,82.22 94.13,82.22 79.55,82.46 114.04,82.45 78.91,82.47 80.19,82.47 106.36,82.52 107.05,82.52 114.99,82.53 93.07,82.76 93.58,82.76 94.11,82.76 78.92,83.04 79.55,83.03 80.22,83.04 106.34,83.08 107.03,83.08 114.04,83.227 114.99,83.307 114.04,84.004 114.99,84.084 114.04,84.78 67.36,84.83 114.99,84.86 67.34,85.51 63.73,85.56 64.507,85.56 65.283,85.56 66.06,85.56 114.07,85.96 115.02,86.04 58.75,86.09 63.65,86.51 64.426,86.51 65.203,86.51 65.98,86.51 114.07,86.736 115.02,86.816 104.04,87.32 104.816,87.32 105.593,87.32 106.37,87.32 91.06,87.5 91.836,87.5 92.613,87.5 93.39,87.5 114.07,87.513 115.02,87.593 71.74,87.64 72.49,87.64 77.35,87.63 78.127,87.63 78.903,87.63 79.68,87.63 85.61,87.8 86.36,87.8 63.93,88.05 98.25,88.09 99.27,88.12 74.87,88.19 75.46,88.18 82.29,88.19 82.97,88.19 88.95,88.18 89.63,88.18 95.78,88.19 96.46,88.19 102.21,88.21 102.89,88.21 67.15,88.27 67.83,88.27 103.96,88.27 104.736,88.27 105.513,88.27 106.29,88.27 114.07,88.29 115.02,88.37 77.32,88.4 78.096,88.4 78.91,88.42 79.69,88.44 90.98,88.45 91.756,88.45 92.62,88.45 93.41,88.45 58.86,89.89 74.84,90.23 68.73,90.24 88.749,90.27 83.94,90.41 86.55,90.42 113.63,90.44 66.29,90.47 77.49,90.47 82.12,90.48 70.71,90.5 91.6,90.49 98.4,90.49 104.88,90.53 95.67,90.68 93.49,91.02 79.95,91.09 107.09,91.37 99.66,91.38 102.09,91.72 72.7,91.98 84.948,92.49 74.87,92.59 68.66,92.75 61.9,92.96 77.32,93.085 82.83,93.09 90.95,93.26 108.5,93.38 70.62,93.86 113.66,93.91 88.75,94.04 86.51,94.08 80.02,94.1 93.56,94.2 96.66,94.3 99.78,94.59 73.28,94.69 81.57,94.92 76.08,95.04 103.29,95.29 106.23,95.67 109.73,95.82 84.8,95.86 65.39,96.22 81.59,96.37 87.56,96.39 77.45,96.92 96.98,97.14 90.41,97.21 93.34,97.43 113.74,97.45 76.46,97.61 98.77,97.73 91.477,98.285 90.077,98.305 90.75,98.29 103.39,98.53 100.04,98.61 107.05,98.66 61.42,98.75 79.74,98.77 68.87,98.96 111.97,99.45 61.413,99.501 71.6,99.52 114.25,99.63 74.39,99.92 66.99,100.01 111.97,100.067 97.952,100.17 61.38,100.21 87.28,100.5 83.7,100.54 111.97,100.683 69.69,100.75 101.07,100.9 116.34,100.99 106.28,101.15 79.36,101.16 111.97,101.3 108.44,101.89 88.98,102.06 103.55,102.11 73.66,102.18 78.09,102.42 81.73,102.51 67.03,102.76 92.005,103.01 98.59,103.19 96.02,103.25 93.4,103.29 111.38,103.36 70.87,103.47 87.19,103.84 111.35,103.98 110,104.4 110.68,104.39 105.1,104.46 67.87,104.68 113.72,104.73 71.64,104.99 102.6,105.27 113.69,105.35 101.3,105.6 102.6,105.87 63.2,105.98 66.79,106.26 87.88,106.26 78.31,106.41 79.98,106.47 106.02,106.73 108.11,106.79 98.98,106.81 83.93,106.84 84.74,106.88 85.97,106.88 101.26,107.69 111.339,107.791 75.51,108.06 76.9,108.07 64.34,108.19 93.403,108.56 93.403,108.56 82.19,108.71 98.8,108.71 87.84,108.82 112.1,109.22 103.34,109.5 101.15,109.59 112.1,109.837 114.1,110.06 103.34,110.1 112.1,110.453 72.15,110.58 82.57,110.72 86.88,110.73 92.57,110.72 97.95,110.74 75,110.78 78.8,110.76 100.66,110.85 112.1,111.07 72.14,111.23 64.29,111.46 100.65,111.54
L1_1: C8.1 L1.1 U15.2
  other v1: 106.76,103.4 108.01,103.4 109.46,103.45 107.37,103.912 106.73,104.44 108.04,104.45
LED6_2: LED6.2 R15.1 | length 0.9
  Top Layer w0.254: LED6.2@84.008,97.31 R15.1@84.947,97.31
NRST: R41.1 U3.7 | length 3.4
  Top Layer w0.2: R41.1@69.71,110.557 70.687,109.58 70.95,109.58 71.43,109.1 U3.7@71.43,108.01
R1_1: F3.1 R1.1 U4.6 | length 6.6
  Top Layer w0.2: U4.6@90.852,99.575 92.525,99.575 R1.1@92.92,99.18
  Top Layer w0.4: U4.6@90.852,99.575 94.093,99.575 F3.1@94.907,98.76
R1_2: F2.1 R1.2 U4.7 | length 6.6
  Top Layer w0.2: U4.7@90.852,100.845 92.585,100.845 R1.2@92.92,101.18
  Top Layer w0.4: U4.7@90.852,100.845 94.192,100.845 F2.1@94.907,101.56
R3_1: LED3.1 R3.1 | length 0.7
  Top Layer w0.28: 69.128,77.4 69.557,77.4 R3.1@69.74,77.217